# Altium PCB Hien thi LED.PcbDoc
Units mm, origin at the board's own origin, x right, y up, seen from the top; angles counter-clockwise.
Board outline 38.1 x 11.43 mm, 2 copper layers (Top Layer, Bottom Layer); 11 components, 11 nets, 28 pads, 0 vias.
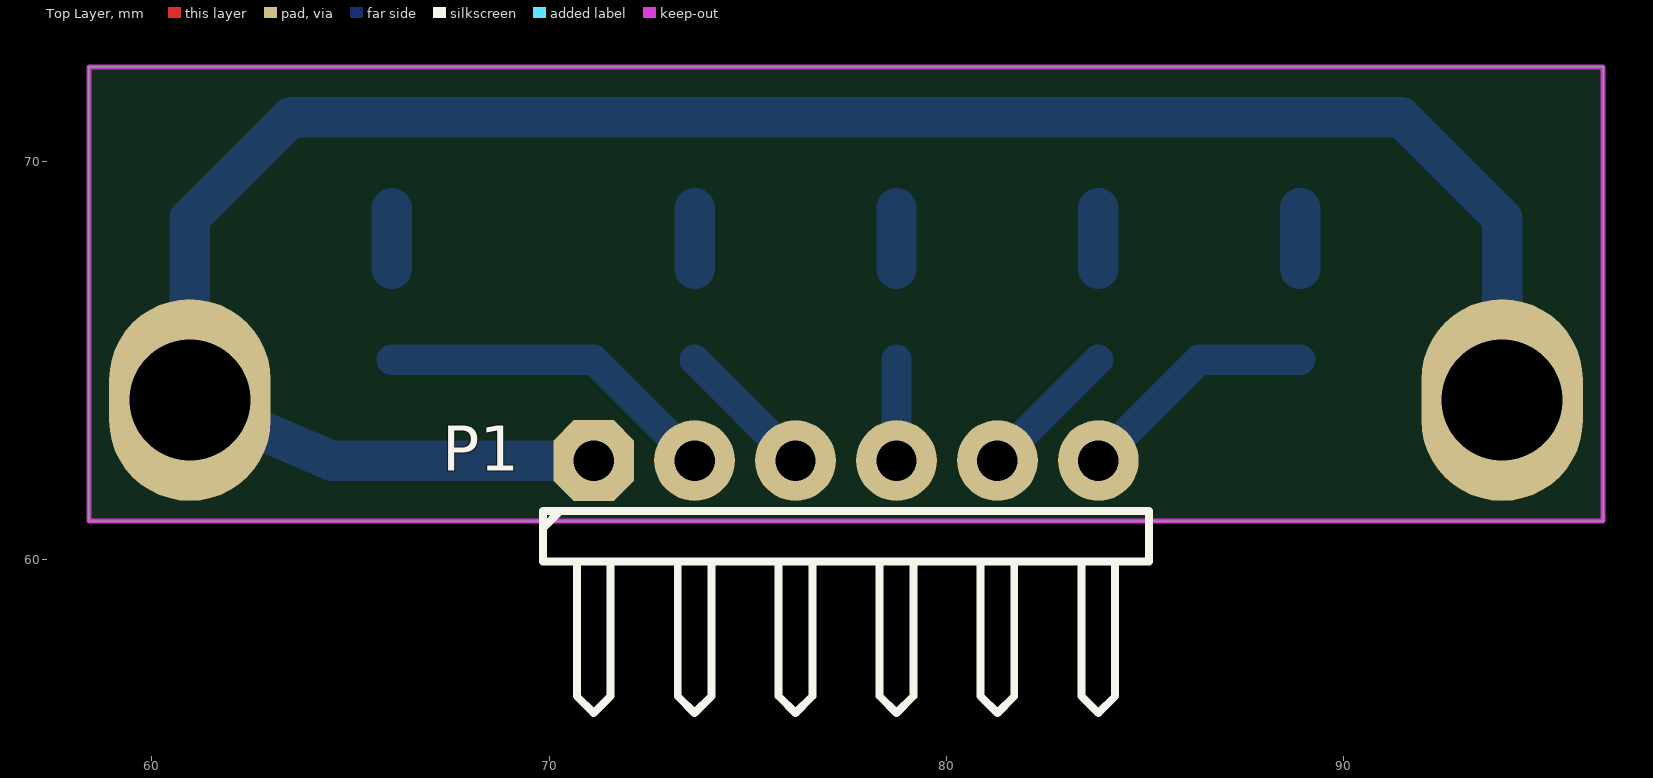
[diagram p0: Top Layer view]
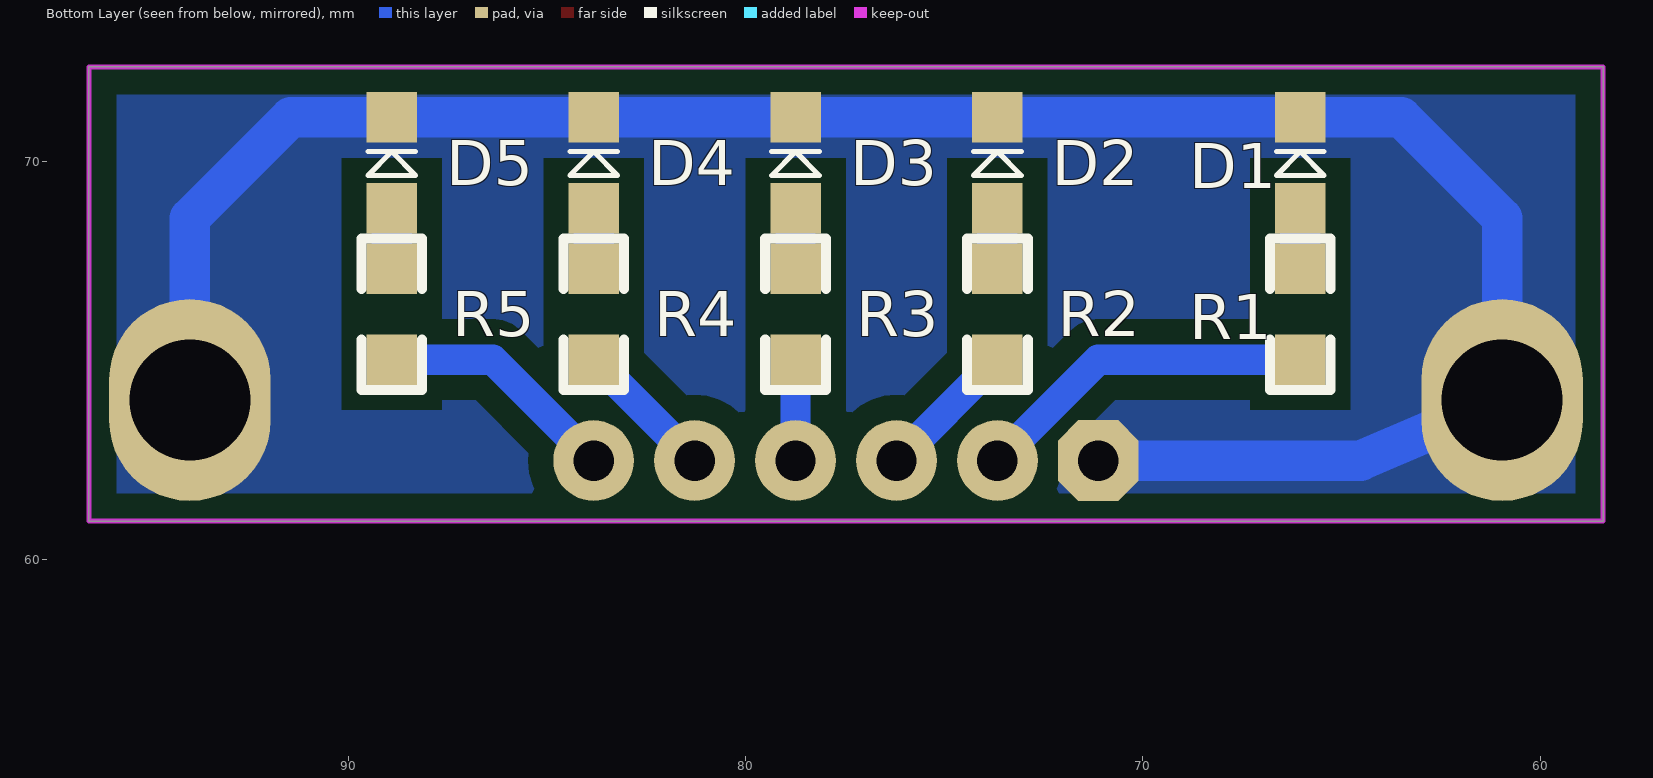
[diagram p1: Bottom Layer view, seen from below]
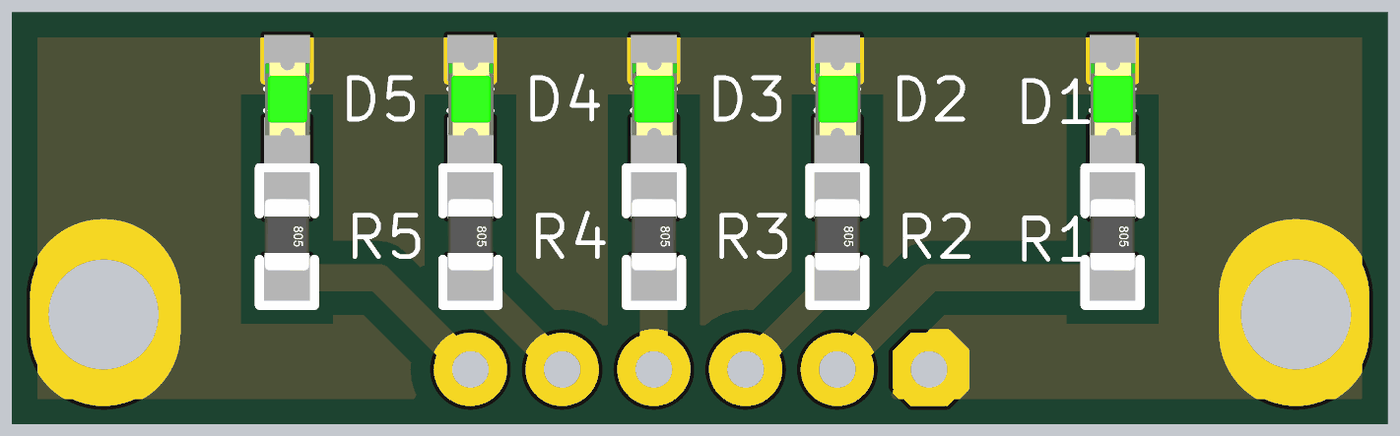
[diagram p2: 3D render of the assembled board from below, using the file's embedded part models]

## Layer stack, top to bottom
Top Solder: solder mask 0.0102, Solder Resist, Dk 3.5
Top Layer: signal copper 0.0356
Dielectric 1: dielectric 0.32, FR-4, Dk 4.8
Bottom Layer: signal copper 0.0356
Bottom Solder: solder mask 0.0102, Solder Resist, Dk 3.5

## Board outline
58.42,60.96 58.42,72.39 96.52,72.39 96.52,60.96

## Design rules (kind name [scope] priority, off if disabled: settings)
Clearance [All] p1: gap=0.254 ignorepadtopadclearanceinfootprint=FALSE except(0: Arc-Hole Track-Hole SMDPad-Hole THPad-Hole Via-Hole Fill-Hole Poly-Hole Region-Hole Text-Hole; 0.635: Arc-Poly Track-Poly SMDPad-Poly THPad-Poly Via-Poly Fill-Poly Poly-Poly)
ComponentClearance [All] p1 off: gap=0.254 collisioncheckmode=3 verticalgap=0.254 showdistances=FALSE
Height [All] p1 off: minheight=0 maxheight=25.4 prefheight=12.7
HoleSize [All] p1: absolutevalues=TRUE maxlimit=5.08 minlimit=0.025 maxpercent=80.000 minpercent=20.000
PolygonConnect [All] p1: connectstyle=Direct reliefconductorwidth=0.254 reliefentries=4 polygonreliefangle="90 Angle" airgapwidth=0.254
RoutingVias [All] p1: holewidth=0.711 width=1.27 viastyle="Through Hole" minholewidth=0.711 minwidth=1.27 maxholewidth=0.711 maxwidth=1.27
SolderMaskExpansion [All] p1: expansion=0.102
Width [All] p1: maxlimit=2.54 minlimit=0.254 preferedwidth=1.016
27 further rules are at their usual default settings.

## Components (designator, comment, footprint, x,y, rotation, side; value= is the part's Value field where it differs from the comment)
D1 "LED dán 0805 BLUE" LED0805 66.04,68.834 r90 bottom value=BLUE
D2 "LED dán 0805 RED" LED0805 73.66,68.834 r90 bottom value=RED
D3 "LED dán 0805 YELLOW" LED0805 78.74,68.834 r90 bottom value=YELLOW
D4 "LED dán 0805 YELLOW" LED0805 83.82,68.834 r90 bottom value=YELLOW
D5 "LED dán 0805 GREEN" LED0805 88.9,68.834 r90 bottom value=GREEN
P1 "Jump đực chân thẳng, 2.54mm 6P" HDR1X6H 71.12,62.484 r0 top value=6P
R1 "Điện trở dán 0805 470R" 0805DD 66.04,67.31 r270 bottom value=470R
R2 "Điện trở dán 0805 470R" 0805DD 73.66,67.31 r270 bottom value=470R
R3 "Điện trở dán 0805 470R" 0805DD 78.74,67.31 r270 bottom value=470R
R4 "Điện trở dán 0805 470R" 0805DD 83.82,67.31 r270 bottom value=470R
R5 "Điện trở dán 0805 470R" 0805DD 88.9,67.31 r270 bottom value=470R

## Footprints (in the part's own frame and the unit in brackets; to place one, negate y for a bottom-side part, rotate by r counter-clockwise, add the part's x,y. Pads: shape width x height; smd on the part's side, far side on the other; paste and mask are expansions set on the pad)
0805DD [mil]
  rect 50x50 smd: 1(0,0) 2(90,0)
  silkscreen extent -30,-30 120,30, body extent 4,-25 82,25, height 31
HDR1X6H [mil] "Connector; Header; 6 Position; Right Angle"
  oct 80x80 hole 40: 1(0,0)
  round 80 hole 40: 2(100,0) 3(200,0) 4(300,0) 5(400,0) 6(500,0)
  silkscreen extent -50,-250 550,-50
LED0805 [mil]
  rect 50x50 smd: 1(0,0) 2(90,0)
  silkscreen extent 32,-24 56,24, body extent 5,-25 85,24, height 43

## Part data
D1 D2 D3 D4 D5: library part LED0, "Typical INFRARED GaAs LED", Type1="LED dán 0805", Type2="LED chân c?m 3mm", Type3="LED chân c?m 5mm"
P1: library part "Header 6H", "Header, 6-Pin, Right Angle", LatestRevisionDate=17-Jul-2002, LatestRevisionNote="Re-released for DXP Platform.", Publisher="Altium Limited"
R1 R2 R3 R4 R5: library part "Res Semi", "Semiconductor Resistor", Type1="Ði?n tr? dán 0805", Type2="Ði?n tr? chân c?m 1/4W", Type3="Ði?n tr? chân c?m 2W", Type4="Ði?n tr? dán 2512"

## Free pads (board coordinates)
  oval 4.064x5.08 hole 3.048: 0(60.96,64.008) 0(93.98,64.008)

## Nets (pads, with @x,y where several pads share a name; then routed paths per layer and width w, separated by ;. In a path a pad name is that pad's centre, name@x,y a point inside that pad or via, vN(x,y) a via of type N, cw(c..) or ccw(c..) an arc to the next point about the centre after c; other vN are vias at no path point)
"BATTERY FULL": P1.6 R5.2 | length 6.1
  Bottom Layer w0.762: P1.6 86.36,65.024 R5.2
"BATTERY HIGH": P1.5 R4.2 | length 3.6
  Bottom Layer w0.762: P1.5 R4.2
"BATTERY LOW": P1.3 R2.2 | length 3.6
  Bottom Layer w0.762: R2.2 P1.3
"BATTERY MED": P1.4 R3.2 | length 2.5
  Bottom Layer w0.762: P1.4 R3.2
GND: D1.2 D2.2 D3.2 D4.2 D5.2 P1.1 pad.0 | length 54.7
  Bottom Layer w1.016: P1.1 64.516,62.484 60.96,64.008 60.96,68.58 63.5,71.12 D1.2 D2.2 D3.2 D4.2 D5.2 91.44,71.12 93.98,68.58 pad.0@93.98,64.008
NetD1_1: D1.1 R1.1 | length 1.5
  Bottom Layer w1.016: R1.1 D1.1
NetD2_1: D2.1 R2.1 | length 1.5
  Bottom Layer w1.016: R2.1 D2.1
NetD3_1: D3.1 R3.1 | length 1.5
  Bottom Layer w1.016: R3.1 D3.1
NetD4_1: D4.1 R4.1 | length 1.5
  Bottom Layer w1.016: R4.1 D4.1
NetD5_1: D5.1 R5.1 | length 1.5
  Bottom Layer w1.016: R5.1 D5.1
"REMOTE MODE": P1.2 R1.2 | length 8.7
  Bottom Layer w0.762: R1.2 71.12,65.024 P1.2

## Polygon pours and split planes (outlines as drawn)
GND on Bottom Layer "Bottom Layer-No Net" (solid, pour order 0): 58.42,60.96 96.52,60.96 96.52,72.39 58.42,72.39 58.42,60.96

## Keep-outs
Keep-Out Layer:
  the board outline again, w0.127